# Altium PCB 敏儿好学.PcbDoc (part 5 of 6)
Units mm, origin at the board's own origin, x right, y up, seen from the top; angles counter-clockwise.
Board outline 169.8 x 134.24 mm, 2 copper layers (Top Layer, Bottom Layer); 131 components, 191 nets, 797 pads, 168 vias.
Unrouted connection lines stored in the file: 2.
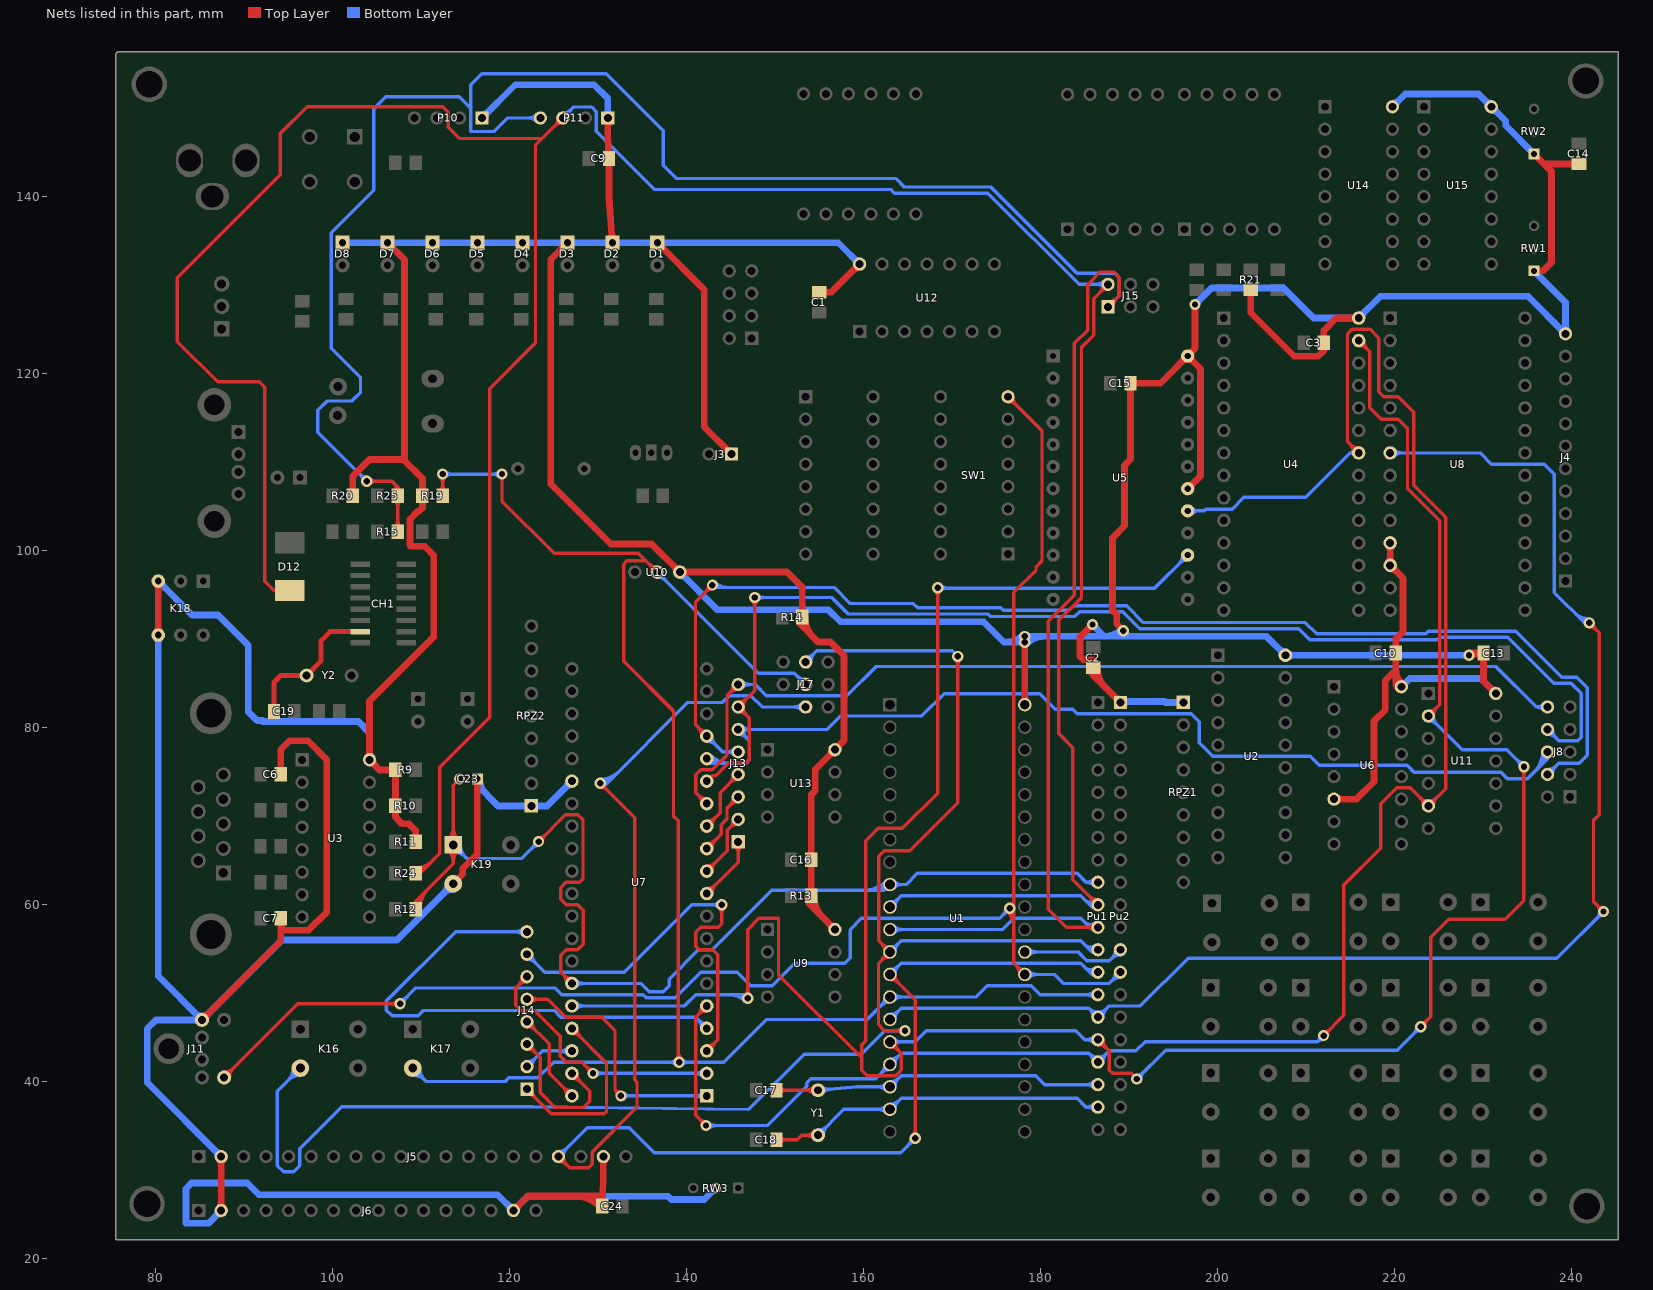
[diagram p5: the nets of this part, all layers, seen from the top]

## Via types
v1: diameter 1.27, hole 0.711, Top Layer to Bottom Layer, 165 vias
v2: diameter 1, hole 0.5, Top Layer to Bottom Layer, 3 vias

## Nets (pads, with @x,y where several pads share a name; then routed paths per layer and width w, separated by ;. In a path a pad name is that pad's centre, name@x,y a point inside that pad or via, vN(x,y) a via of type N, cw(c..) or ccw(c..) an arc to the next point about the centre after c; other vN are vias at no path point) (continued)
P2.7: J11.5 Pu2.13 SW1.8 U1.28 | length 201
  Top Layer w0.381: J11.5@87.708,40.438 96.038,48.768 v1(107.594,48.768) ; J11.5@87.708,41.048 ccw(c87.708,42.519) 88.748,41.478 ccw(c89.789,40.438) J11.5@88.317,40.438 ; v1@107.28,48.454 ccw(c106.521,47.695) 106.521,48.768 ccw(c106.521,49.841) v1@107.28,49.082 ; v1@176.165,59.249 cw(c174.364,57.447) 176.911,57.447 ; SW1.8@176.276,116.789 cw(c176.276,115.438) 177.231,116.393 cw(c178.186,117.348) SW1.8@176.835,117.348 ; SW1.8@176.276,117.348 180.119,113.505 180.119,98.805 179.445,98.131 179.445,97.766 176.911,95.232 176.911,59.563 v1@176.911,59.131 ; v1@176.434,59.518 cw(c175.283,58.367) 176.911,58.367 ; v1(176.479,59.563) v1@176.911,59.131 ; U1.28@177.609,52.07 ccw(c176.23,52.07) 177.205,53.046 ccw(c178.181,54.021) U1.28@178.181,52.642 ; U1.28@178.181,52.07 176.911,53.34 v1@176.911,59.131
  Bottom Layer w0.381: v1(107.594,48.768) 109.372,50.546 125.07,50.546 125.832,49.784 135.039,49.784 135.386,49.437 138.671,49.437 141.559,52.324 145.694,52.324 147.218,50.8 149.631,50.8 152.171,53.34 157.81,53.34 158.445,53.975 158.445,57.15 159.715,58.42 175.336,58.42 v1(176.479,59.563) ; v1@107.594,49.212 ccw(c107.594,50.286) 108.353,49.527 ccw(c109.112,48.768) v1@108.039,48.768 ; v1@176.035,59.563 cw(c174.962,59.563) 175.72,58.804 cw(c176.479,58.045) v1@176.479,59.118 ; U1.28@178.181,52.07 181.508,52.07 182.524,51.054 187.706,51.054 Pu2.13@188.976,52.324 ; U1.28@178.585,51.666 cw(c179.561,50.69) 179.561,52.07 cw(c179.561,53.45) U1.28@178.585,52.474 ; Pu2.13@188.417,52.324 cw(c187.066,52.324) 188.021,51.369 cw(c188.976,50.414) Pu2.13@188.976,51.765
P3.2: J17.3 K16.2 Pu1.12 U1.12 | length 206.8
  Top Layer w0.381: U1.12@162.941,54.038 ccw(c162.941,52.659) 161.965,53.634 ccw(c160.99,54.61) 162.369,54.61 ccw(c160.99,54.61) 161.965,55.586 ccw(c162.941,56.561) U1.12@162.941,55.181 ; v1@164.328,45.406 ccw(c163.57,44.647) 163.57,45.72 ccw(c163.57,46.793) v1@164.328,46.034 ; v1(164.643,45.72) 162.306,45.72 161.65,46.376 161.65,53.319 U1.12@162.941,54.61 161.671,55.88 161.671,65.405 162.306,66.04 165.176,66.04 170.612,71.476 v1(170.612,88.011) ; v1@170.297,87.697 cw(c169.539,86.938) 170.612,86.938 cw(c171.685,86.938) v1@170.926,87.697
  Bottom Layer w0.381: K16.2@95.509,41.488 cw(c93.554,41.488) 94.936,40.106 cw(c96.318,38.724) K16.2@96.318,40.679 ; K16.2@95.89,41.488 cw(c94.855,41.488) 95.587,40.757 cw(c96.318,40.025) K16.2@96.318,41.06 ; K16.2@96.318,41.488 93.726,38.896 93.726,30.48 94.437,29.769 95.555,29.769 96.266,30.48 96.266,32.385 101.003,37.122 122.542,37.122 147.002,36.817 153.249,43.064 159.701,43.064 162.357,45.72 v1(164.643,45.72) ; J17.3@153.416,87.376 154.686,88.646 169.977,88.646 v1(170.612,88.011) ; J17.3@153.416,87.947 ccw(c153.416,89.327) 154.392,88.352 ccw(c155.367,87.376) J17.3@153.987,87.376 ; U1.12@162.941,54.61 164.211,55.88 184.505,55.88 185.521,54.864 Pu1.12@186.436,54.864 ; U1.12@162.941,55.181 ccw(c162.941,56.561) 163.917,55.586 ccw(c164.892,54.61) U1.12@163.512,54.61 ; v1@164.328,45.406 ccw(c163.57,44.647) 163.57,45.72 ccw(c163.57,46.793) v1@164.328,46.034 ; 184.962,55.422 ccw(c185.598,56.058) Pu1.12@186.115,55.322 ; 185.283,55.102 ccw(c185.863,55.681) Pu1.12@186.334,55.01 ; 185.604,54.781 ccw(c186.127,55.304) Pu1.12@186.552,54.698
P3.3: J5.17 J17.5 Pu1.13 U1.13 | length 191.8
  Top Layer w0.381: J5.17@125.476,30.937 cw(c125.476,29.586) 126.431,30.541 cw(c127.386,31.496) J5.17@126.035,31.496 ; J5.17@125.476,31.496 126.746,30.226 128.905,30.226 129.311,30.632 129.311,32.012 134.353,37.054 134.353,39.903 134.087,40.17 134.087,69.799 v1(130.2,73.685) ; v1@130.2,73.241 cw(c130.2,72.168) 130.959,72.927 cw(c131.718,73.685) v1@130.645,73.685 ; U1.13@162.941,51.498 cw(c162.941,50.119) 163.917,51.094 cw(c164.892,52.07) U1.13@163.512,52.07 ; U1.13@162.941,52.07 165.786,49.225 v1(165.786,33.579) ; v1@165.471,33.893 ccw(c164.713,34.652) 165.786,34.652 ccw(c166.859,34.652) v1@166.1,33.893
  Bottom Layer w0.381: J5.17@125.476,31.496 128.74,34.76 133.49,34.76 136.322,31.928 164.135,31.928 v1(165.786,33.579) ; J5.17@125.476,32.055 ccw(c125.476,33.406) 126.431,32.451 ccw(c127.386,31.496) J5.17@126.035,31.496 ; v1@130.2,73.368 ccw(c130.2,74.471) 130.981,73.691 ; v1(130.2,73.685) 130.975,73.685 ; v1@130.2,73.749 ccw(c130.2,75.772) 131.631,74.341 ; v1@130.2,74.13 ccw(c130.2,77.073) 132.281,74.992 ; v1@130.584,73.461 cw(c130.975,73.233) 130.975,73.685 ; v1@130.584,73.91 ccw(c130.975,74.138) 130.975,73.685 ; J17.5@153.012,81.892 ccw(c152.036,80.916) 152.036,82.296 ccw(c152.036,83.676) J17.5@153.012,82.7 ; J17.5@153.416,82.296 148.488,82.296 147.218,83.566 144.78,83.566 144.018,82.804 140.093,82.804 130.975,73.685 ; U1.13@162.941,52.07 164.198,53.327 184.505,53.327 185.508,52.324 Pu1.13@186.436,52.324 ; U1.13@162.941,52.642 ccw(c162.941,54.021) 163.917,53.046 ccw(c164.892,52.07) U1.13@163.512,52.07 ; v1@165.341,33.579 cw(c164.268,33.579) 165.027,32.82 cw(c165.786,32.061) v1@165.786,33.134 ; 184.969,52.863 ccw(c185.588,53.483) Pu1.13@186.106,52.776 ; 185.283,52.549 ccw(c185.854,53.12) Pu1.13@186.331,52.468 ; 185.598,52.234 ccw(c186.12,52.756) Pu1.13@186.556,52.161
P3.4: J17.4 K17.2 Pu1.14 R19.1 U1.14 U10.2 | length 229.3
  Top Layer w0.381: R19.1@112.036,106.658 ccw(c111.169,107.525) 112.395,107.525 ccw(c113.621,107.525) R19.1@112.754,106.658 ; v1@112.081,108.296 cw(c111.322,107.537) 112.395,107.537 cw(c113.468,107.537) v1@112.709,108.296 ; R19.1@112.395,106.172 v1(112.395,108.61) ; v1(119.101,108.61) 119.101,105.562 124.993,99.67 134.518,99.67 U10.2@136.652,97.536 ; 135.382,98.806 133.223,98.806 132.842,98.425 132.842,87.478 138.481,81.839 138.481,69.948 139.001,69.427 139.001,42.278 v1(139.116,42.164) ; U10.2@136.081,97.536 ccw(c134.701,97.536) 135.676,98.512 ccw(c136.652,99.487) U10.2@136.652,98.108 ; v1@138.801,42.478 ccw(c138.319,42.961) 139.001,42.961 ; 139.001,43.513 ccw(c140.465,43.513) v1@139.43,42.478
  Bottom Layer w0.381: K17.2@109.018,40.679 cw(c109.018,38.724) 110.4,40.106 cw(c111.782,41.488) K17.2@109.828,41.488 ; K17.2@109.018,41.06 cw(c109.018,40.025) 109.75,40.757 cw(c110.481,41.488) K17.2@109.447,41.488 ; K17.2@109.018,41.488 110.526,39.98 119.482,39.98 119.888,40.386 123.165,40.386 124.943,42.164 144.17,42.164 148.996,46.99 160.401,46.99 U1.14@162.941,49.53 172.669,49.53 173.939,50.8 178.892,50.8 179.908,49.784 Pu1.14@186.436,49.784 ; v1(112.395,108.61) v1(119.101,108.61) ; v1@112.709,108.296 cw(c113.468,107.537) 113.468,108.61 cw(c113.468,109.684) v1@112.709,108.925 ; v1@118.786,108.296 ccw(c118.027,107.537) 118.027,108.61 ccw(c118.027,109.684) v1@118.786,108.925 ; U10.2@136.652,96.965 cw(c136.652,95.585) 137.628,96.56 cw(c138.603,97.536) U10.2@137.224,97.536 ; U10.2@136.652,97.536 148.082,86.106 152.146,86.106 J17.4@153.416,84.836 ; v1@138.801,41.85 ccw(c138.043,41.091) 138.043,42.164 ccw(c138.043,43.237) v1@138.801,42.478 ; v1@139.43,41.85 cw(c140.189,41.091) 140.189,42.164 cw(c140.189,43.237) v1@139.43,42.478 ; J17.4@152.844,84.836 ccw(c151.465,84.836) 152.44,85.812 ccw(c153.416,86.787) J17.4@153.416,85.407 ; U1.14@162.369,49.53 cw(c160.99,49.53) 161.965,48.554 cw(c162.941,47.579) U1.14@162.941,48.959 ; U1.14@163.345,49.126 cw(c164.321,48.15) 164.321,49.53 cw(c164.321,50.91) U1.14@163.345,49.934 ; Pu1.14@186.04,49.388 ccw(c185.085,48.433) 185.085,49.784 ccw(c185.085,51.135) Pu1.14@186.04,50.18
P3.5: Pu1.15 U1.15 U8.7 | length 175.2
  Top Layer w0.381: v1@241.96,91.351 cw(c241.96,90.278) 242.719,91.037 cw(c243.478,91.796) v1@242.405,91.796 ; v1(241.96,91.796) 243.079,90.677 243.079,70.13 242.43,69.482 242.43,60.312 v1(243.561,59.182) ; v1@243.116,59.182 ccw(c242.043,59.182) 242.802,59.941 ccw(c243.561,60.7) v1@243.561,59.627
  Bottom Layer w0.381: U1.15@162.941,46.99 164.211,48.26 185.42,48.26 Pu1.15@186.436,47.244 187.706,48.514 191.211,48.514 196.621,53.924 238.303,53.924 v1(243.561,59.182) ; U1.15@162.941,47.561 ccw(c162.941,48.941) 163.917,47.966 ccw(c164.892,46.99) U1.15@163.512,46.99 ; Pu1.15@185.877,47.244 ccw(c184.526,47.244) 185.481,48.199 ccw(c186.436,49.154) 186.436,47.803 ccw(c186.436,49.154) 187.391,48.199 ccw(c188.346,47.244) Pu1.15@186.995,47.244 ; U8.7@219.456,110.998 229.62,110.998 230.89,109.728 236.855,109.728 237.998,108.585 237.998,95.225 241.427,91.796 v1(241.96,91.796) ; U8.7@219.86,110.594 cw(c220.836,109.618) 220.836,110.998 cw(c220.836,112.378) U8.7@219.86,111.402 ; 240.291,92.932 ccw(c241.96,94.601) v1@241.96,92.24 ; 240.941,92.281 ccw(c241.96,93.3) v1@241.96,91.859 ; v1@243.116,59.182 cw(c242.043,59.182) 242.802,58.423 cw(c243.561,57.664) v1@243.561,58.737
PA0: J14.8 U7.4 | length 62
  Bottom Layer w0.381: J14.8@121.524,56.5 ccw(c120.569,55.545) 120.569,56.896 ccw(c120.569,58.247) J14.8@121.524,57.292 ; J14.8@121.92,56.896 113.868,56.896 106.045,49.073 106.045,48.031 106.68,47.396 109.626,47.396 110.236,48.006 124.993,48.006 125.755,47.244 140.97,47.244 U7.4@142.24,45.974 ; U7.4@141.668,45.974 ccw(c140.289,45.974) 141.264,46.95 ccw(c142.24,47.925) U7.4@142.24,46.545
PA1: J14.7 U7.3 | length 55.1
  Top Layer w0.381: U7.3@142.24,43.434 143.497,44.691 143.497,54.292 142.939,54.851 141.376,54.851 140.983,55.245 140.983,56.832 141.554,57.404 143.561,57.404 143.942,57.785 v1(143.942,59.944) ; U7.3@142.24,44.005 ccw(c142.24,45.385) 143.216,44.41 ccw(c144.191,43.434) U7.3@142.811,43.434 ; v1@143.627,59.63 cw(c142.869,58.871) 143.942,58.871 cw(c145.015,58.871) v1@144.256,59.63
  Bottom Layer w0.381: J14.7@121.92,53.797 cw(c121.92,52.446) 122.875,53.401 cw(c123.83,54.356) J14.7@122.479,54.356 ; J14.7@121.92,54.356 123.952,52.324 132.944,52.324 140.564,59.944 v1(143.942,59.944) ; v1@143.627,59.63 ccw(c142.869,58.871) 142.869,59.944 ccw(c142.869,61.017) v1@143.627,60.258
PA2: J14.6 U7.2 | length 37.5
  Top Layer w0.381: J14.6@121.361,51.816 cw(c120.01,51.816) 120.965,50.861 cw(c121.92,49.906) J14.6@121.92,51.257 ; J14.6@121.92,51.816 120.675,50.571 120.675,48.578 121.271,47.981 122.808,47.981 125.705,45.085 125.705,42.824 126.365,42.164 128.118,42.164 v1(129.388,40.894) ; v1@128.943,40.894 ccw(c127.87,40.894) 128.629,41.653 ccw(c129.388,42.412) v1@129.388,41.338
  Bottom Layer w0.381: v1(129.388,40.894) U7.2@142.24,40.894 ; v1@129.702,40.58 cw(c130.461,39.821) 130.461,40.894 cw(c130.461,41.967) v1@129.702,41.208 ; U7.2@141.836,40.49 ccw(c140.86,39.514) 140.86,40.894 ccw(c140.86,42.274) U7.2@141.836,41.298
PA3: J14.5 U7.1 | length 36.1
  Top Layer w0.381: J14.5@121.92,49.276 124.249,49.276 126.281,47.244 130.353,47.244 131.877,45.72 131.877,39.014 ; J14.5@122.316,48.88 cw(c123.271,47.925) 123.271,49.276 cw(c123.271,50.627) J14.5@122.316,49.672 ; v1@132.095,38.4 ccw(c131.34,38.478) 131.877,39.014 ; v1@132.491,38.796 cw(c132.413,39.551) 131.877,39.014 ; v1(132.537,38.354) 131.877,39.014
  Bottom Layer w0.381: v1(132.537,38.354) U7.1@142.24,38.354 ; v1@132.852,38.04 cw(c133.61,37.281) 133.61,38.354 cw(c133.61,39.427) v1@132.852,38.668 ; U7.1@141.836,37.95 ccw(c140.86,36.974) 140.86,38.354 ccw(c140.86,39.734) U7.1@141.836,38.758
PA4: J14.4 U7.40 | length 14.8
  Top Layer w0.381: J14.4@121.92,46.177 cw(c121.92,44.826) 122.875,45.781 cw(c123.83,46.736) J14.4@122.479,46.736 ; J14.4@121.92,46.736 124.435,44.221 124.435,40.919 U7.40@127,38.354 ; U7.40@126.428,38.354 ccw(c125.049,38.354) 126.024,39.33 ccw(c127,40.305) U7.40@127,38.925
PA5: J14.3 U7.39 | length 20.9
  Top Layer w0.381: J14.3@121.92,43.637 cw(c121.92,42.286) 122.875,43.241 cw(c123.83,44.196) J14.3@122.479,44.196 ; J14.3@121.92,44.196 123.419,42.697 123.419,38.735 125.12,37.033 128.27,37.033 129.007,37.77 129.007,38.887 U7.39@127,40.894 ; U7.39@127,40.322 cw(c127,38.943) 127.976,39.918 cw(c128.951,40.894) U7.39@127.572,40.894
PA6: J14.2 U7.38 | length 10.1
  Bottom Layer w0.381: J14.2@121.92,41.656 123.698,43.434 U7.38@127,43.434 ; J14.2@121.92,42.215 ccw(c121.92,43.566) 122.875,42.611 ccw(c123.83,41.656) J14.2@122.479,41.656 ; U7.38@126.596,43.03 ccw(c125.62,42.054) 125.62,43.434 ccw(c125.62,44.814) U7.38@126.596,43.838
PA7: J14.1 U7.37 | length 25.5
  Top Layer w0.381: J14.1@121.92,38.557 cw(c121.92,37.206) 122.875,38.161 cw(c123.83,39.116) J14.1@122.479,39.116 ; J14.1@121.92,39.116 124.689,36.347 130.683,36.347 130.912,36.576 130.912,42.062 U7.37@127,45.974 ; U7.37@127,45.402 cw(c127,44.023) 127.976,44.998 cw(c128.951,45.974) U7.37@127.572,45.974
PC0: J8.10 J13.8 U7.14 | length 120.3
  Top Layer w0.381: U7.14@141.668,71.374 ccw(c140.289,71.374) 141.264,72.35 ccw(c142.24,73.325) U7.14@142.24,71.945 ; U7.14@142.24,71.374 140.983,72.631 140.983,74.612 141.567,75.197 142.875,75.197 144.526,76.848 144.526,83.566 J13.8@145.796,84.836 ; J13.8@145.237,84.836 cw(c143.886,84.836) 144.841,83.881 cw(c145.796,82.926) J13.8@145.796,84.277
  Bottom Layer w0.381: J13.8@145.796,84.836 147.701,84.836 148.971,83.566 158.064,83.566 161.366,86.868 231.387,86.868 235.959,82.296 ; J13.8@146.192,84.44 cw(c147.147,83.485) 147.147,84.836 cw(c147.147,86.187) J13.8@146.192,85.232 ; J8.10@236.825,81.917 ccw(c235.959,81.118) 235.959,82.296 ; J8.10@236.825,82.675 cw(c235.959,83.474) 235.959,82.296 ; J8.10@237.236,82.296 235.959,82.296
PC1: J8.8 J13.7 U7.15 | length 143.2
  Top Layer w0.381: U7.15@142.24,73.914 142.837,74.511 143.243,74.511 144.702,75.971 146.685,75.971 147.041,76.327 147.041,81.051 J13.7@145.796,82.296 147.65,84.15 v1(147.65,94.666) ; J13.7@145.796,81.737 cw(c145.796,80.386) 146.751,81.341 cw(c147.706,82.296) 146.355,82.296 cw(c147.706,82.296) 146.751,83.251 cw(c145.796,84.206) J13.7@145.796,82.855 ; v1@147.336,94.351 cw(c146.577,93.593) 147.65,93.593 cw(c148.723,93.593) v1@147.965,94.351
  Bottom Layer w0.381: v1(147.65,94.666) 156.381,94.666 158.247,92.8 174.01,92.8 174.287,92.523 183.836,92.523 184.366,93.053 189.268,93.053 191.173,91.148 209.127,91.148 210.395,89.88 224.78,89.88 225.059,90.159 232.76,90.159 237.944,84.976 239.89,84.976 241.046,83.82 241.046,78.867 240.665,78.486 238.506,78.486 J8.8@237.236,79.756 ; v1@147.965,94.351 cw(c148.723,93.593) 148.723,94.666 cw(c148.723,95.739) v1@147.965,94.98 ; J8.8@237.236,79.197 cw(c237.236,77.846) 238.191,78.801 cw(c239.146,79.756) J8.8@237.795,79.756
PC2: J8.6 J13.6 U7.16 | length 124.4
  Bottom Layer w0.381: U7.16@142.105,76.319 ccw(c143.007,77.221) 143.007,75.946 ; U7.16@142.24,76.454 142.24,75.946 146.685,75.946 147.066,76.327 147.066,78.486 J13.6@145.796,79.756 155.88,79.756 157.404,81.28 166.535,81.28 169.062,83.807 179.845,83.807 181.61,82.042 183.591,82.042 184.099,81.534 196.977,81.534 197.866,80.645 197.866,78.232 199.39,76.708 210.414,76.708 211.43,75.692 221.386,75.692 222.148,74.93 231.978,74.93 232.715,74.193 234.975,74.193 237.236,76.454 J8.6@237.236,77.216 ; U7.16@142.375,76.589 ccw(c143.926,78.14) 143.926,75.946 ; U7.16@142.644,76.858 ccw(c144.846,79.06) 144.846,75.946 ; J13.6@145.796,79.197 cw(c145.796,77.846) 146.751,78.801 cw(c147.706,79.756) J13.6@146.355,79.756 ; J13.6@146.192,79.36 cw(c147.147,78.405) 147.147,79.756 cw(c147.147,81.107) J13.6@146.192,80.152 ; 235.742,74.96 ccw(c233.486,77.216) J8.6@236.677,77.216 ; 236.392,75.61 ccw(c234.787,77.216) J8.6@237.058,77.216 ; 237.043,76.261 ccw(c236.088,77.216) J8.6@237.439,77.216
PC3: J8.4 J13.5 U7.17 | length 152.7
  Top Layer w0.381: U7.17@141.668,78.994 ccw(c140.289,78.994) 141.264,79.97 ccw(c142.24,80.945) U7.17@142.24,79.566 ; U7.17@142.24,78.994 140.97,80.264 140.97,94.158 v1(142.875,96.063) ; v1@142.43,96.063 cw(c141.357,96.063) 142.116,95.304 cw(c142.875,94.545) v1@142.875,95.618
  Bottom Layer w0.381: U7.17@142.24,78.422 cw(c142.24,77.043) 143.216,78.018 cw(c144.191,78.994) U7.17@142.811,78.994 ; U7.17@142.24,78.994 144.018,77.216 J13.5@145.796,77.216 ; v1(142.875,96.063) 143.142,95.796 156.623,95.796 158.439,93.98 165.571,93.98 166.065,93.486 175.468,93.486 175.745,93.209 183.15,93.209 183.68,93.739 189.674,93.739 191.579,91.834 209.884,91.834 211.152,90.566 223.482,90.566 223.761,90.845 233.652,90.845 238.836,85.661 240.525,85.661 241.732,84.455 241.732,76.835 240.843,75.946 238.506,75.946 J8.4@237.236,74.676 ; v1@142.92,96.108 ccw(c143.672,96.86) 143.672,95.796 ; v1@143.189,96.377 ccw(c144.592,97.78) 144.592,95.796 ; J13.5@145.4,76.82 ccw(c144.445,75.865) 144.445,77.216 ccw(c144.445,78.567) J13.5@145.4,77.612 ; J8.4@237.236,75.235 ccw(c237.236,76.586) 238.191,75.631 ccw(c239.146,74.676) J8.4@237.795,74.676
PC4: J13.4 U7.13 | length 11.6
  Top Layer w0.381: U7.13@142.24,68.834 143.748,70.342 143.748,72.628 J13.4@145.796,74.676 ; U7.13@142.24,69.406 ccw(c142.24,70.785) 143.216,69.81 ccw(c144.191,68.834) U7.13@142.811,68.834 ; J13.4@145.237,74.676 cw(c143.886,74.676) 144.841,73.721 cw(c145.796,72.766) J13.4@145.796,74.117
PC5: J13.3 U7.12 | length 11.6
  Top Layer w0.381: U7.12@142.24,66.294 143.865,67.919 143.865,68.987 144.526,69.648 144.526,70.866 J13.3@145.796,72.136 ; U7.12@142.24,66.865 ccw(c142.24,68.245) 143.216,67.27 ccw(c144.191,66.294) U7.12@142.811,66.294 ; J13.3@145.237,72.136 cw(c143.886,72.136) 144.841,71.181 cw(c145.796,70.226) J13.3@145.796,71.577
PC6: J13.2 U7.11 | length 11.6
  Top Layer w0.381: U7.11@142.24,63.754 144.551,66.065 144.551,68.351 J13.2@145.796,69.596 ; U7.11@142.24,64.325 ccw(c142.24,65.705) 143.216,64.73 ccw(c144.191,63.754) U7.11@142.811,63.754 ; J13.2@145.237,69.596 cw(c143.886,69.596) 144.841,68.641 cw(c145.796,67.686) J13.2@145.796,69.037
PC7: J13.1 U7.10 | length 11.6
  Top Layer w0.381: U7.10@142.24,61.214 145.796,64.77 J13.1@145.796,67.056 ; U7.10@142.24,61.785 ccw(c142.24,63.165) 143.216,62.19 ccw(c144.191,61.214) U7.10@142.811,61.214 ; J13.1@145.4,66.66 cw(c144.445,65.705) 145.796,65.705 cw(c147.147,65.705) J13.1@146.192,66.66
PSEN: Pu2.12 U1.29 | length 16
  Bottom Layer w0.381: U1.29@178.181,54.61 184.2,54.61 185.191,53.619 187.731,53.619 Pu2.12@188.976,54.864 ; U1.29@178.585,54.206 cw(c179.561,53.23) 179.561,54.61 cw(c179.561,55.99) U1.29@178.585,55.014 ; Pu2.12@188.417,54.864 cw(c187.066,54.864) 188.021,53.909 cw(c188.976,52.954) Pu2.12@188.976,54.305
RD: Pu1.17 U1.17 U4.22 U5.17 U7.5 U11.6 | length 250.2
  Top Layer w0.381: U7.5@141.668,48.514 cw(c140.289,48.514) 141.264,47.538 cw(c142.24,46.563) U7.5@142.24,47.942 ; v1@141.719,35.001 ccw(c140.646,35.001) 141.405,35.76 ccw(c142.164,36.519) v1@142.164,35.446 ; v1(142.164,35.001) 140.983,36.182 140.983,47.257 U7.5@142.24,48.514 ; v1(211.938,45.161) 214.224,47.447 214.224,62.179 218.389,66.345 218.389,71.349 220.193,73.152 221.742,73.152 U11.6@223.774,71.12 225.73,73.076 225.73,103.734 222.104,107.359 222.104,115.614 220.37,117.348 218.745,117.348 218.186,117.907 218.186,123.952 217.183,124.955 215.138,124.955 214.643,124.46 214.643,112.255 U4.22@215.9,110.998 ; v1@211.938,45.606 ccw(c211.938,46.679) 212.696,45.92 ccw(c213.455,45.161) v1@212.382,45.161 ; U4.22@215.328,110.998 ccw(c213.949,110.998) 214.924,111.974 ccw(c215.9,112.949) U4.22@215.9,111.569 ; U11.6@223.215,71.12 ccw(c221.864,71.12) 222.819,72.075 ccw(c223.774,73.03) 223.774,71.679 ccw(c223.774,73.03) 224.729,72.075 ccw(c225.684,71.12) U11.6@224.333,71.12
  Bottom Layer w0.381: v1(142.164,35.001) 149.06,35.001 153.518,39.459 153.518,39.814 153.987,40.284 161.315,40.284 U1.17@162.941,41.91 164.211,43.18 185.42,43.18 Pu1.17@186.436,42.164 187.706,43.434 190.729,43.434 191.77,44.475 211.252,44.475 ; v1@142.478,34.687 cw(c143.237,33.928) 143.237,35.001 cw(c143.237,36.074) v1@142.478,35.316 ; U1.17@162.369,41.91 cw(c160.99,41.91) 161.965,40.934 cw(c162.941,39.959) U1.17@162.941,41.338 ; U1.17@162.941,42.481 ccw(c162.941,43.861) 163.917,42.886 ccw(c164.892,41.91) U1.17@163.512,41.91 ; Pu1.17@185.877,42.164 ccw(c184.526,42.164) 185.481,43.119 ccw(c186.436,44.074) 186.436,42.723 ccw(c186.436,44.074) 187.391,43.119 ccw(c188.346,42.164) Pu1.17@186.995,42.164 ; U5.17@196.576,104.454 198.434,104.454 198.628,104.648 201.6,104.648 202.933,105.981 209.914,105.981 214.93,110.998 ; U5.17@196.972,104.058 cw(c197.927,103.103) 197.927,104.454 cw(c197.927,105.805) U5.17@196.972,104.85 ; v1@211.494,45.128 cw(c210.661,45.066) 211.252,44.475 ; v1@211.905,44.718 ccw(c211.843,43.884) 211.252,44.475 ; v1(211.938,45.161) 211.252,44.475 ; U4.22@215.4,110.721 ccw(c214.93,110.461) 214.93,110.998 ; U4.22@215.4,111.275 cw(c214.93,111.535) 214.93,110.998 ; U4.22@215.9,110.998 214.93,110.998
RST: C23.2 K19.1 Pu1.9 R12.2 U1.9 U7.35 | length 163.4
  Top Layer w0.381: R12.2@109.093,59.563 cw(c110.364,59.563) 109.465,60.462 ; R12.2@109.141,60.028 ccw(c109.002,60.343) 109.347,60.343 ccw(c109.692,60.343) R12.2@109.553,60.028 ; R12.2@109.347,59.436 109.347,60.343 113.59,64.586 K19.1@113.59,66.716 113.59,73.442 C23.2@114.316,74.168 ; R12.2@109.474,59.563 cw(c111.665,59.563) 110.116,61.112 ; R12.2@109.855,59.563 cw(c112.966,59.563) 110.766,61.763 ; K19.1@113.018,66.144 cw(c111.636,64.762) 113.59,64.762 cw(c115.544,64.762) K19.1@114.162,66.144 ; K19.1@113.018,67.288 ccw(c111.636,68.67) 113.59,68.67 ccw(c115.544,68.67) K19.1@114.162,67.288 ; K19.1@113.287,66.413 cw(c112.556,65.682) 113.59,65.682 cw(c114.625,65.682) K19.1@113.893,66.413 ; K19.1@113.287,67.019 ccw(c112.556,67.75) 113.59,67.75 ccw(c114.625,67.75) K19.1@113.893,67.019 ; v1(123.241,67.081) 126.263,70.104 127.686,70.104 128.257,69.532 128.257,62.865 127.864,62.471 126.314,62.471 125.73,61.887 125.73,60.579 126.365,59.944 127.635,59.944 128.27,59.309 128.27,55.499 127.635,54.864 126.365,54.864 125.73,54.229 125.73,52.324 U7.35@127,51.054 ; v1@123.241,67.526 ccw(c123.241,68.599) 124,67.84 ccw(c124.758,67.081) v1@123.685,67.081 ; U7.35@126.428,51.054 ccw(c125.049,51.054) 126.024,52.03 ccw(c127,53.005) U7.35@127,51.626
  Bottom Layer w0.381: K19.1@113.59,65.906 cw(c113.59,63.952) 114.972,65.334 cw(c116.354,66.716) K19.1@114.4,66.716 ; K19.1@113.59,66.287 cw(c113.59,65.253) 114.322,65.985 cw(c115.053,66.716) K19.1@114.019,66.716 ; K19.1@113.59,66.716 115.13,65.176 121.336,65.176 v1(123.241,67.081) ; v1@122.796,67.081 cw(c121.723,67.081) 122.482,66.323 cw(c123.241,65.564) v1@123.241,66.637 ; U7.35@127,51.054 134.793,51.054 135.725,50.123 137.308,50.123 137.986,50.8 137.986,51.549 141.3,54.864 142.85,54.864 149.581,61.595 162.306,61.595 U1.9@162.941,62.23 164.775,62.23 166.032,63.487 184.086,63.487 185.089,62.484 Pu1.9@186.436,62.484 ; U7.35@127.404,50.65 cw(c128.38,49.674) 128.38,51.054 cw(c128.38,52.434) U7.35@127.404,51.458 ; 160.028,61.595 ccw(c160.028,65.143) U1.9@162.537,62.634 ; 160.948,61.595 ccw(c160.948,64.223) U1.9@162.806,62.365 ; 161.868,61.595 ccw(c161.868,63.303) U1.9@163.076,62.095 ; U1.9@163.345,61.826 cw(c164.321,60.85) 164.321,62.23 cw(c164.321,63.61) U1.9@163.345,62.634 ; Pu1.9@186.04,62.089 ccw(c185.089,61.143) 185.089,62.484 ccw(c185.089,63.825) Pu1.9@186.04,62.879
RXD: D12.1 J15.2 P11.3 Pu1.10 R24.2 U1.10 | length 383.4
  Top Layer w0.381: D12.1@93.705,95.17 ccw(c93.32,95.056) 93.32,95.458 ; D12.1@93.705,95.746 cw(c93.32,95.86) 93.32,95.458 ; D12.1@95.123,95.458 93.32,95.458 ; R24.2@109.347,63.5 109.347,63.729 110.071,63.729 ; R24.2@109.347,63.754 ccw(c109.347,65.563) 110.626,64.284 ; R24.2@109.347,64.135 ccw(c109.347,66.864) 111.277,64.934 ; R24.2@109.781,63.892 ccw(c110.071,64.068) 110.071,63.729 ; R24.2@109.848,63.541 cw(c110.071,63.502) 110.071,63.729 ; 123.673,146.533 114.3,146.533 113.03,147.803 113.03,149.479 112.395,150.114 97.079,150.114 94.056,147.091 94.056,142.443 82.423,130.81 82.423,123.571 86.97,119.024 91.694,119.024 92.278,118.44 92.278,96.499 93.32,95.458 ; P11.3@125.425,148.844 cw(c124.074,148.844) 125.029,147.889 cw(c125.984,146.934) P11.3@125.984,148.285 ; P11.3@125.984,148.844 122.885,145.745 122.885,123.419 117.729,118.262 117.729,81.128 112.09,75.489 112.09,65.748 110.071,63.729 ; Pu1.10@185.877,59.944 ccw(c184.526,59.944) 185.481,60.899 ccw(c186.436,61.854) Pu1.10@186.436,60.503 ; Pu1.10@186.436,59.944 183.604,62.776 183.604,77.71 182.016,79.298 182.016,92.075 184.582,94.64 184.582,122.947 185.954,124.319 185.954,128.423 J15.2@187.579,130.048 ; J15.2@187.02,130.048 cw(c185.669,130.048) 186.624,129.093 cw(c187.579,128.138) J15.2@187.579,129.489
  Bottom Layer w0.381: P11.3@125.984,148.844 127.229,150.089 129.222,150.089 129.769,149.542 129.769,147.32 136.323,140.767 163.03,140.767 163.449,140.348 174.003,140.348 184.302,130.048 J15.2@187.579,130.048 ; P11.3@125.984,149.403 ccw(c125.984,150.754) 126.939,149.799 ccw(c127.894,148.844) P11.3@126.543,148.844 ; U1.10@162.941,59.69 164.198,60.947 184.505,60.947 185.508,59.944 Pu1.10@186.436,59.944 ; U1.10@162.941,60.261 ccw(c162.941,61.641) 163.917,60.666 ccw(c164.892,59.69) U1.10@163.512,59.69 ; 184.969,60.483 ccw(c185.588,61.103) Pu1.10@186.106,60.396 ; 185.283,60.169 ccw(c185.854,60.74) Pu1.10@186.331,60.088 ; 185.598,59.854 ccw(c186.12,60.376) Pu1.10@186.556,59.781 ; J15.2@187.183,129.652 ccw(c186.228,128.697) 186.228,130.048 ccw(c186.228,131.399) J15.2@187.183,130.444
TXD: J15.1 P11.4 Pu1.11 R15.1 R25.2 U1.11 | length 312
  Top Layer w0.381: v1(103.835,107.798) 106.693,107.798 107.315,107.175 ; v1@104.15,107.483 cw(c104.908,106.724) 104.908,107.798 cw(c104.908,108.871) v1@104.15,108.112 ; 106.761,107.729 cw(c105.654,106.623) R25.2@107.19,106.323 ; R15.1@106.956,102.594 ccw(c106.089,103.461) 107.315,103.461 ccw(c108.541,103.461) R15.1@107.674,102.594 ; R25.2@106.956,105.686 cw(c106.089,104.819) 107.315,104.819 cw(c108.541,104.819) R25.2@107.674,105.686 ; R25.2@107.063,106.74 ccw(c106.813,107.175) 107.315,107.175 ; 107.267,107.223 cw(c106.502,106.458) R25.2@107.564,106.25 ; R15.1@107.315,102.108 107.315,107.175 ; R25.2@107.567,106.74 cw(c107.817,107.175) 107.315,107.175 ; Pu1.11@186.04,57.008 ccw(c185.085,56.053) 185.085,57.404 ccw(c185.085,58.755) Pu1.11@186.04,57.8 ; Pu1.11@186.436,57.404 182.88,57.404 180.823,59.461 180.823,91.961 183.769,94.907 183.769,123.381 185.268,124.88 185.268,130.023 186.69,131.445 188.214,131.445 188.849,130.81 188.849,128.778 J15.1@187.579,127.508 ; J15.1@187.579,128.067 ccw(c187.579,129.418) 188.534,128.463 ccw(c189.489,127.508) J15.1@188.138,127.508
  Bottom Layer w0.381: v1@103.391,107.798 ccw(c102.318,107.798) 103.076,108.556 ccw(c103.835,109.315) v1@103.835,108.242 ; v1(103.835,107.798) 98.298,113.335 98.298,115.824 99.339,116.865 102.133,116.865 103.124,117.856 103.124,119.507 99.797,122.834 99.797,135.89 104.597,140.691 104.597,149.86 105.969,151.232 114.3,151.232 115.57,149.962 ; P11.4@123.048,148.448 ccw(c122.093,147.493) 122.093,148.844 ccw(c122.093,150.195) P11.4@123.048,149.24 ; P11.4@123.444,148.844 119.761,148.844 118.237,147.32 115.57,147.32 115.57,152.578 116.84,153.848 130.886,153.848 137.312,147.422 137.312,143.51 138.811,142.011 163.572,142.011 164.538,141.046 174.32,141.046 184.073,131.293 188.366,131.293 188.849,130.81 188.849,128.778 J15.1@187.579,127.508 ; U1.11@162.941,57.15 175.641,57.15 176.911,58.42 184.505,58.42 185.521,57.404 Pu1.11@186.436,57.404 ; U1.11@163.345,56.746 cw(c164.321,55.77) 164.321,57.15 cw(c164.321,58.53) U1.11@163.345,57.554 ; 184.962,57.962 ccw(c185.598,58.598) Pu1.11@186.115,57.862 ; 185.283,57.642 ccw(c185.863,58.221) Pu1.11@186.334,57.55 ; 185.604,57.321 ccw(c186.127,57.844) Pu1.11@186.552,57.238 ; J15.1@187.579,128.067 ccw(c187.579,129.418) 188.534,128.463 ccw(c189.489,127.508) J15.1@188.138,127.508
VCC: C1.1 C2.1 C3.1 C6.2 C7.2 C9.1 C10.1 C13.1 C14.1 C15.1 C16.1 C23.1 C24.2 D1.1 D2.1 D3.1 D4.1 D5.1 D6.1 D7.1 D8.1 J3.1 J4.12 J5.2 J5.19 J6.2 J6.15 J11.4 K18.3 K18.4 K19.2 P10.1 P11.1 Pu2.1 R9.1 R10.1 R11.1 R13.2 R14.2 R19.2 R20.1 R21.1 RPZ1.1 RPZ2.1 RW1.1 RW2.1 RW3.2 U1.40 U2.20 U3.16 U4.28 U5.18 U5.24 U6.6 U6.16 U7.26 U8.11 U8.12 U9.8 U10.3 U11.14 U12.14 U13.8 U14.16 U15.16 | length 1180.8
  Top Layer w0.762: K18.4@79.995,90.693 ccw(c79.344,91.344) 80.264,91.344 ccw(c81.184,91.344) K18.4@80.533,90.693 ; K18.3@79.995,96.251 cw(c79.344,95.6) 80.264,95.6 cw(c81.184,95.6) K18.3@80.533,96.251 ; K18.4@80.264,90.424 K18.3@80.264,96.52 ; J11.4@85.208,46.938 94.107,55.837 C7.2@94.107,58.42 ; J11.4@85.208,47.357 ccw(c85.208,48.369) 85.923,47.653 ccw(c86.639,46.938) J11.4@85.627,46.938 ; J6.2@87.115,25.661 ccw(c86.485,26.291) 87.376,26.291 ccw(c88.267,26.291) J6.2@87.637,25.661 ; J5.2@87.115,31.235 cw(c86.485,30.605) 87.376,30.605 cw(c88.267,30.605) J5.2@87.637,31.235 ; J6.2@87.376,25.4 J5.2@87.376,31.496 ; C6.2@93.882,75.028 ccw(c93.34,75.57) 94.107,75.57 ccw(c94.874,75.57) C6.2@94.332,75.028 ; 94.107,57.468 94.501,57.074 97.257,57.074 99.314,59.131 99.314,76.327 97.155,78.486 95.123,78.486 94.107,77.47 C6.2@94.107,74.676 ; R20.1@102.01,106.524 ccw(c101.468,107.066) 102.235,107.066 ccw(c103.002,107.066) R20.1@102.46,106.524 ; R20.1@102.235,106.172 102.235,108.356 104.14,110.261 107.95,110.261 110.109,108.102 110.109,104.775 109.753,104.419 109.626,104.419 108.712,103.505 108.712,100.711 108.725,100.711 108.725,100.444 110.376,100.444 111.379,99.441 111.379,90.195 104.14,82.956 U3.16@104.14,76.327 105.283,75.184 R9.1@107.061,75.184 107.061,69.85 107.823,69.088 108.585,69.088 109.347,68.326 R11.1@109.347,67.056 ; U3.16@103.879,76.588 ccw(c103.249,77.218) 104.14,77.218 ccw(c105.031,77.218) U3.16@104.401,76.588 ; U3.16@104.14,75.958 cw(c104.14,75.067) 104.77,75.697 cw(c105.4,76.327) U3.16@104.509,76.327 ; D7.1@106.172,134.328 cw(c106.172,133.316) 106.887,134.032 cw(c107.603,134.747) D7.1@106.591,134.747 ; D7.1@106.172,134.747 108.077,132.842 108.077,110.261 108.013,110.198 ; R10.1@106.836,70.768 cw(c106.294,70.226) 107.061,70.226 cw(c107.828,70.226) R10.1@107.286,70.768 ; R10.1@106.836,71.472 ccw(c106.294,72.014) 107.061,72.014 ccw(c107.828,72.014) R10.1@107.286,71.472 ; R9.1@106.836,74.832 cw(c106.294,74.29) 107.061,74.29 cw(c107.828,74.29) R9.1@107.286,74.832 ; R9.1@106.836,74.959 ccw(c106.294,74.417) 106.294,75.184 ccw(c106.294,75.951) R9.1@106.836,75.409 ; R11.1@109.122,67.408 ccw(c108.58,67.95) 109.347,67.95 ccw(c110.114,67.95) R11.1@109.572,67.408 ; R19.2@109.884,105.82 cw(c109.342,105.278) 110.109,105.278 cw(c110.876,105.278) R19.2@110.334,105.82 ; R19.2@109.884,106.524 ccw(c109.342,107.066) 110.109,107.066 ccw(c110.876,107.066) R19.2@110.334,106.524 ; K19.2@113.59,62.316 114.67,63.396 114.67,64.049 116.316,65.696 C23.1@116.316,74.168 ; J6.15@120.396,25.4 122.047,27.051 130.429,27.051 C24.2@130.429,25.908 130.556,28.829 J5.19@130.556,31.496 ; J6.15@120.396,25.769 ccw(c120.396,26.66) 121.026,26.03 ccw(c121.656,25.4) J6.15@120.765,25.4 ; D3.1@126.073,134.747 cw(c125.061,134.747) 125.777,134.032 cw(c126.492,133.316) D3.1@126.492,134.328 ; D3.1@126.492,134.747 124.612,132.867 124.612,107.493 131.394,100.711 136.017,100.711 U10.3@139.192,97.536 151.308,97.536 153.035,95.809 153.035,91.44 154.832,89.643 156.21,89.643 157.753,88.1 157.753,78.505 154.508,75.26 154.508,72.873 154.051,72.415 154.051,59.817 U9.8@156.718,57.15 ; 127.21,27.051 cw(c127.21,22.816) C24.2@130.204,25.81 ; 129.049,27.051 cw(c129.049,24.655) C24.2@130.743,26.349 ; C24.2@130.204,26.26 ccw(c129.662,26.802) 130.429,26.802 ccw(c131.196,26.802) C24.2@130.654,26.26 ; C24.2@130.214,26.269 ccw(c129.684,26.848) 130.468,26.814 ; J5.19@130.295,31.235 cw(c129.665,30.605) 130.556,30.605 cw(c131.447,30.605) J5.19@130.817,31.235 ; 130.467,26.787 ccw(c131.214,26.755) C24.2@130.663,26.25 ; P11.1@130.803,148.583 cw(c130.173,147.953) 131.064,147.953 cw(c131.955,147.953) P11.1@131.325,148.583 ; C9.1@130.955,144.611 ccw(c130.402,145.109) 131.145,145.148 ; C9.1@130.966,143.92 cw(c130.424,143.378) 131.191,143.378 cw(c131.958,143.378) C9.1@131.416,143.92 ; P11.1@131.064,148.844 131.064,146.685 C9.1@131.191,144.272 131.191,139.903 D2.1@131.572,134.747 ; 131.143,145.18 ccw(c131.931,145.222) C9.1@131.403,144.635 ; D2.1@131.255,135.021 ccw(c130.489,135.681) 131.497,135.756 ccw(c132.506,135.83) D2.1@131.846,135.064 ; D1.1@136.652,134.328 cw(c136.652,133.316) 137.367,134.032 cw(c138.083,134.747) D1.1@137.071,134.747 ; D1.1@136.652,134.747 141.948,129.451 141.948,113.957 J3.1@145.034,110.871 ; U10.3@138.811,97.536 ccw(c137.891,97.536) 138.542,98.186 ccw(c139.192,98.837) U10.3@139.192,97.917 ; U10.3@139.461,97.267 cw(c140.112,96.616) 140.112,97.536 cw(c140.112,98.456) U10.3@139.461,97.805 ; J3.1@144.665,110.871 ccw(c143.774,110.871) 144.404,111.501 ccw(c145.034,112.131) J3.1@145.034,111.24 ; R14.2@152.59,92.329 ccw(c153.664,92.329) 152.905,91.57 ; R14.2@152.81,92.808 ccw(c152.268,93.35) 153.035,93.35 ccw(c153.802,93.35) R14.2@153.26,92.808 ; R14.2@153.352,92.329 ccw(c156.265,92.329) 154.206,90.269 ; R13.2@153.606,60.833 ccw(c154.986,60.833) 154.011,59.857 ; R13.2@153.826,61.312 ccw(c153.284,61.854) 154.051,61.854 ccw(c154.818,61.854) R13.2@154.276,61.312 ; C16.1@153.826,64.672 cw(c153.284,64.13) 154.051,64.13 cw(c154.818,64.13) C16.1@154.276,64.672 ; C16.1@153.826,65.376 ccw(c153.284,65.918) 154.051,65.918 ccw(c154.818,65.918) C16.1@154.276,65.376 ; R13.2@154.368,60.833 ccw(c157.588,60.833) 155.311,58.557 ; C1.1@154.94,129.159 156.337,129.159 U12.14@159.512,132.334 ; C1.1@155.292,128.934 cw(c155.834,128.392) 155.834,129.159 cw(c155.834,129.926) C1.1@155.292,129.384 ; U9.8@156.349,57.15 ccw(c155.458,57.15) 156.088,57.78 ccw(c156.718,58.41) U9.8@156.718,57.519 ; U13.8@156.349,77.47 cw(c155.458,77.47) 156.088,76.84 cw(c156.718,76.21) U13.8@156.718,77.101 ; U13.8@156.718,77.839 ccw(c156.718,78.73) 157.348,78.1 ccw(c157.978,77.47) U13.8@157.087,77.47 ; U12.14@159.143,132.334 cw(c158.252,132.334) 158.882,131.704 cw(c159.512,131.074) U12.14@159.512,131.965 ; U1.40@177.912,82.819 ccw(c177.261,83.47) 178.181,83.47 ccw(c179.101,83.47) U1.40@178.45,82.819 ; U1.40@178.181,82.55 v1(178.181,90.272) ; C2.1@185.611,86.741 ccw(c186.99,86.741) 186.015,85.765 ; C2.1@185.703,86.516 cw(c185.161,85.974) 185.928,85.974 cw(c186.695,85.974) C2.1@186.153,86.516 ; C2.1@185.703,86.966 ccw(c185.161,87.508) 185.928,87.508 ccw(c186.695,87.508) C2.1@186.153,86.966 ; v1(185.814,91.605) 184.417,90.208 184.417,88.011 184.785,87.643 185.928,87.643 185.928,85.852 Pu2.1@188.976,82.804 ; 185.928,85.843 cw(c186.74,85.843) C2.1@186.248,86.489 ; C2.1@186.373,86.741 ccw(c189.592,86.741) 187.315,84.465 ; Pu2.1@188.607,82.804 ccw(c187.716,82.804) 188.346,83.434 ccw(c188.976,84.064) Pu2.1@188.976,83.173 ; v1(189.306,90.907) 188.57,91.643 188.57,92.723 188.074,93.218 188.074,101.409 189.433,102.768 189.433,109.601 190.119,110.287 C15.1@190.119,118.872 193.494,118.872 197.409,122.787 v1(197.409,127.762) ; C15.1@189.894,118.52 cw(c189.352,117.978) 190.119,117.978 cw(c190.886,117.978) C15.1@190.344,118.52 ; C15.1@190.344,118.647 cw(c190.886,118.105) 190.886,118.872 cw(c190.886,119.639) C15.1@190.344,119.097 ; U5.24@196.207,121.954 cw(c195.316,121.954) 195.946,121.324 cw(c196.576,120.694) 196.576,121.585 cw(c196.576,120.694) 197.206,121.324 cw(c197.836,121.954) U5.24@196.945,121.954 ; U5.18@196.576,106.954 198.018,108.396 198.018,120.512 U5.24@196.576,121.954 ; U5.18@196.576,107.323 ccw(c196.576,108.214) 197.206,107.584 ccw(c197.836,106.954) U5.18@196.945,106.954 ; R21.1@203.483,129.188 cw(c202.941,128.646) 203.708,128.646 cw(c204.475,128.646) R21.1@203.933,129.188 ; R21.1@203.708,129.413 203.708,126.835 208.623,121.92 211.328,121.92 211.963,122.555 ; 211.709,122.301 ccw(c211.298,122.712) C3.1@211.728,123.103 ; C3.1@211.738,123.796 ccw(c211.196,124.338) 211.963,124.338 ccw(c212.73,124.338) C3.1@212.188,123.796 ; C3.1@211.739,123.092 cw(c211.207,122.555) 211.963,122.555 ; C3.1@212.187,123.092 ccw(c212.719,122.555) 211.963,122.555 ; U6.6@213.106,71.882 215.667,71.882 217.627,73.842 217.627,80.7 218.897,81.97 218.897,85.268 220.091,86.462 ccw(c221.983,86.462) U6.16@220.931,84.889 ; U6.6@213.367,71.621 cw(c213.997,70.991) 213.997,71.882 cw(c213.997,72.773) U6.6@213.367,72.143 ; U4.28@215.631,125.969 ccw(c214.98,125.318) 214.98,126.238 ccw(c214.98,127.158) U4.28@215.631,126.507 ; U4.28@215.9,126.238 213.36,126.238 211.963,124.841 211.963,122.555 ; U8.12@219.187,98.567 ccw(c218.536,99.218) 219.456,99.218 ccw(c220.376,99.218) U8.12@219.725,98.567 ; U8.11@219.187,100.569 cw(c218.536,99.918) 219.456,99.918 cw(c220.376,99.918) U8.11@219.725,100.569 ; U8.12@219.456,97.917 cw(c219.456,96.997) 220.106,97.648 cw(c220.757,98.298) U8.12@219.837,98.298 ; U8.11@219.456,100.838 U8.12@219.456,98.298 220.904,96.85 220.904,90.805 220.091,89.992 220.091,85.217 U6.16@220.726,84.582 ; C10.1@219.866,88.04 cw(c219.324,87.498) 220.091,87.498 cw(c220.858,87.498) C10.1@220.316,88.04 ; C10.1@219.866,88.744 ccw(c219.324,89.286) 220.091,89.286 ccw(c220.858,89.286) C10.1@220.316,88.744 ; 220.091,85.035 ccw(c221.029,85.035) U6.16@220.507,84.255 ; v1(228.371,88.138) 228.625,88.392 C13.1@229.997,88.392 229.997,85.217 U11.14@231.394,83.82 ; v1@228.551,87.958 cw(c229.598,86.912) C13.1@229.598,88.392 ; C13.1@229.772,88.04 cw(c229.23,87.498) 229.997,87.498 cw(c230.764,87.498) C13.1@230.222,88.04 ; C13.1@229.772,88.167 ccw(c229.23,87.625) 229.23,88.392 ccw(c229.23,89.159) C13.1@229.772,88.617 ; U11.14@231.025,83.82 ccw(c230.134,83.82) 230.764,84.45 ccw(c231.394,85.08) U11.14@231.394,84.189 ; RW1.1@235.712,131.572 236.717,131.572 237.684,132.538 237.684,142.808 RW2.1@235.712,144.78 ; 236.855,143.637 C14.1@240.792,143.637 ; C14.1@240.44,143.412 ccw(c239.898,142.87) 239.898,143.637 ccw(c239.898,144.404) C14.1@240.44,143.862 ; C7.2@93.882,58.068 cw(c93.34,57.526) 94.107,57.526 ; C7.2@93.882,58.068 cw(c93.34,57.526) 94.107,57.526 ; C7.2@93.882,58.068 cw(c93.34,57.526) 94.107,57.526 ; C7.2@93.882,58.068 cw(c93.34,57.526) 94.107,57.526 ; 94.107,57.526 cw(c94.874,57.526) C7.2@94.332,58.068 ; 94.107,57.526 cw(c94.874,57.526) C7.2@94.332,58.068 ; 94.107,57.526 cw(c94.874,57.526) C7.2@94.332,58.068 ; 94.107,57.526 cw(c94.874,57.526) C7.2@94.332,58.068 ; 153.035,91.562 cw(c153.802,91.562) 153.26,92.104 ccw(c153.802,91.562) 153.035,91.562 ; 153.035,91.562 ccw(c152.268,91.562) 152.81,92.104 cw(c152.268,91.562) 153.035,91.562 ; 154.051,60.066 cw(c154.818,60.066) 154.276,60.608 ccw(c154.818,60.066) 154.051,60.066 ; 154.051,60.066 ccw(c153.284,60.066) 153.826,60.608 cw(c153.284,60.066) 154.051,60.066
  Bottom Layer w0.762: K18.4@79.995,90.155 cw(c79.344,89.504) 80.264,89.504 cw(c81.184,89.504) K18.4@80.533,90.155 ; K18.4@80.264,90.424 80.264,51.882 J11.4@85.208,46.938 ; K18.3@80.264,96.139 cw(c80.264,95.219) 80.914,95.87 cw(c81.565,96.52) K18.3@80.645,96.52 ; K18.3@80.264,96.52 84.099,92.685 87.02,92.685 90.424,89.281 90.424,81.788 91.44,80.772 92.075,80.772 ; J11.4@84.789,46.938 ccw(c83.777,46.938) 84.493,47.653 ccw(c85.208,48.369) 85.208,47.357 ccw(c85.208,48.369) 85.923,47.653 ccw(c86.639,46.938) J11.4@85.627,46.938 ; J11.4@84.912,46.642 ccw(c84.196,45.926) 84.196,46.938 ccw(c84.196,47.95) J11.4@84.912,47.234 ; J6.2@87.007,25.4 cw(c86.116,25.4) 86.746,24.77 cw(c87.376,24.14) J6.2@87.376,25.031 ; J5.2@87.007,31.496 ccw(c86.116,31.496) 86.746,32.126 ccw(c87.376,32.756) J5.2@87.376,31.865 ; J6.2@87.376,25.4 85.928,23.952 83.388,23.952 83.388,27.864 84.023,28.499 90.322,28.499 91.643,27.178 118.618,27.178 J6.15@120.396,25.4 121.996,27 137.871,27 138.227,26.645 141.961,26.645 RW3.2@143.256,27.94 ; J5.2@87.376,31.496 79.019,39.853 79.019,45.947 80.01,46.938 J11.4@85.208,46.938 ; 92.075,80.645 102.87,80.645 104.14,79.375 U3.16@104.14,76.327 ; D8.1@101.092,134.747 157.099,134.747 U12.14@159.512,132.334 ; D8.1@101.388,134.451 cw(c102.104,133.735) 102.104,134.747 cw(c102.104,135.759) D8.1@101.388,135.043 ; U3.16@103.879,76.588 ccw(c103.249,77.218) 104.14,77.218 ccw(c105.031,77.218) U3.16@104.401,76.588 ; D7.1@105.876,134.451 ccw(c105.16,133.735) 105.16,134.747 ccw(c105.16,135.759) D7.1@105.876,135.043 ; D7.1@106.468,134.451 cw(c107.184,133.735) 107.184,134.747 cw(c107.184,135.759) D7.1@106.468,135.043 ; D6.1@110.956,134.451 ccw(c110.24,133.735) 110.24,134.747 ccw(c110.24,135.759) D6.1@110.956,135.043 ; D6.1@111.548,134.451 cw(c112.264,133.735) 112.264,134.747 cw(c112.264,135.759) D6.1@111.548,135.043 ; K19.2@112.971,62.316 cw(c111.477,62.316) 112.533,61.259 cw(c113.59,60.203) K19.2@113.59,61.697 ; K19.2@113.59,62.316 107.23,55.956 94.226,55.956 J11.4@85.208,46.938 ; D5.1@116.036,134.451 ccw(c115.32,133.735) 115.32,134.747 ccw(c115.32,135.759) D5.1@116.036,135.043 ; C23.1@116.316,74.168 116.316,73.46 118.656,71.12 124.206,71.12 U7.26@127,73.914 ; C23.1@116.56,74.168 ccw(c118.858,74.168) 117.233,72.543 ; D5.1@116.628,134.451 cw(c117.344,133.735) 117.344,134.747 cw(c117.344,135.759) D5.1@116.628,135.043 ; P10.1@116.84,148.844 120.599,152.603 129.516,152.603 131.064,151.055 P11.1@131.064,148.844 ; P10.1@116.84,149.213 ccw(c116.84,150.104) 117.47,149.474 ccw(c118.1,148.844) P10.1@117.209,148.844 ; J6.15@120.027,25.4 ccw(c119.136,25.4) 119.766,26.03 ccw(c120.396,26.66) 120.396,25.769 ccw(c120.396,26.66) 121.026,26.03 ccw(c121.656,25.4) J6.15@120.765,25.4 ; D4.1@121.116,134.451 ccw(c120.4,133.735) 120.4,134.747 ccw(c120.4,135.759) D4.1@121.116,135.043 ; D4.1@121.708,134.451 cw(c122.424,133.735) 122.424,134.747 cw(c122.424,135.759) D4.1@121.708,135.043 ; RPZ2.1@122.159,70.851 ccw(c121.508,70.2) 121.508,71.12 ccw(c121.508,72.04) RPZ2.1@122.159,71.389 ; RPZ2.1@122.697,70.851 cw(c123.348,70.2) 123.348,71.12 cw(c123.348,72.04) RPZ2.1@122.697,71.389 ; D3.1@126.196,134.451 ccw(c125.48,133.735) 125.48,134.747 ccw(c125.48,135.759) D3.1@126.196,135.043 ; U7.26@126.619,73.914 cw(c125.699,73.914) 126.35,73.264 cw(c127,72.613) U7.26@127,73.533 ; D3.1@126.788,134.451 cw(c127.504,133.735) 127.504,134.747 cw(c127.504,135.759) D3.1@126.788,135.043 ; P11.1@130.803,149.105 ccw(c130.173,149.735) 131.064,149.735 ccw(c131.955,149.735) P11.1@131.325,149.105 ; D2.1@131.276,134.451 ccw(c130.56,133.735) 130.56,134.747 ccw(c130.56,135.759) D2.1@131.276,135.043 ; D2.1@131.868,134.451 cw(c132.584,133.735) 132.584,134.747 cw(c132.584,135.759) D2.1@131.868,135.043 ; D1.1@136.356,134.451 ccw(c135.64,133.735) 135.64,134.747 ccw(c135.64,135.759) D1.1@136.356,135.043 ; D1.1@136.948,134.451 cw(c137.664,133.735) 137.664,134.747 cw(c137.664,135.759) D1.1@136.948,135.043 ; U10.3@139.192,97.155 cw(c139.192,96.235) 139.842,96.886 cw(c140.493,97.536) U10.3@139.573,97.536 ; U10.3@139.192,97.536 143.459,93.269 156.007,93.269 157.352,91.924 173.515,91.924 175.827,89.611 v1(178.181,89.611) 178.841,90.272 ; U12.14@159.143,132.334 ccw(c158.252,132.334) 158.882,132.964 ccw(c159.512,133.594) U12.14@159.512,132.703 ; 175.973,89.611 ccw(c175.973,92.479) v1@178.001,90.451 ; v1@177.813,89.611 ccw(c177.813,90.64) v1@178.54,89.912 ; v1@177.822,89.97 cw(c178.549,89.243) v1@178.549,90.272 ; v1(178.181,90.272) 205.486,90.272 U2.20@207.62,88.138 v1(228.371,88.138) ; v1@178.361,89.432 cw(c180.389,87.404) 180.389,90.272 ; v1(185.814,91.605) 187.147,90.272 ; 187.16,90.272 ccw(c187.16,93.053) v1@189.127,91.086 ; 188.671,90.272 v1(189.306,90.907) ; Pu2.1@188.976,82.804 189.072,82.9 193.954,82.9 194.05,82.804 RPZ1.1@196.088,82.804 ; 189,90.272 ccw(c189,91.213) v1@189.665,90.547 ; Pu2.1@189.237,82.543 cw(c190.099,81.681) 190.099,82.9 ; RPZ1.1@195.819,82.535 ccw(c195.168,81.884) 195.168,82.804 ccw(c195.168,83.724) RPZ1.1@195.819,83.073 ; v1(197.409,127.762) 199.288,129.642 207.411,129.642 210.815,126.238 U4.28@215.9,126.238 218.364,128.702 235.026,128.702 J4.12@239.268,124.46 239.268,128.016 RW1.1@235.712,131.572 ; U2.20@207.239,88.138 ccw(c206.319,88.138) 206.969,88.788 ccw(c207.62,89.439) U2.20@207.62,88.519 ; U2.20@207.889,87.869 cw(c208.539,87.218) 208.539,88.138 cw(c208.539,89.058) U2.20@207.889,88.407 ; U4.28@215.631,125.969 ccw(c214.98,125.318) 214.98,126.238 ccw(c214.98,127.158) U4.28@215.631,126.507 ; U4.28@215.9,126.619 ccw(c215.9,127.539) 216.55,126.888 ccw(c217.201,126.238) U4.28@216.281,126.238 ; U14.16@219.71,150.114 221.158,151.562 229.438,151.562 232.522,148.478 232.522,147.97 RW2.1@235.712,144.78 ; U14.16@219.71,150.483 ccw(c219.71,151.374) 220.34,150.744 ccw(c220.97,150.114) U14.16@220.079,150.114 ; U6.16@220.726,84.582 221.666,85.522 229.692,85.522 U11.14@231.394,83.82 ; U15.16@230.517,150.114 ccw(c229.626,150.114) 230.256,150.744 ccw(c230.886,151.374) U15.16@230.886,150.483 ; U15.16@230.886,149.745 cw(c230.886,148.854) 231.516,149.484 cw(c232.146,150.114) U15.16@231.255,150.114 ; U11.14@231.025,83.82 ccw(c230.134,83.82) 230.764,84.45 ccw(c231.394,85.08) U11.14@231.394,84.189 ; J4.12@238.899,124.46 ccw(c238.008,124.46) 238.638,125.09 ccw(c239.268,125.72) J4.12@239.268,124.829 ; J4.12@239.007,124.721 ccw(c238.377,125.351) 239.268,125.351 ccw(c240.159,125.351) J4.12@239.529,124.721
WR: Pu1.16 U1.16 U4.27 U5.15 U7.36 U11.2 | length 352.8
  Top Layer w0.381: v1@146.548,49.692 ccw(c145.79,50.451) 146.863,50.451 ccw(c147.936,50.451) v1@147.177,49.692 ; v1(146.863,49.378) 146.863,57.15 148.133,58.42 150.318,58.42 150.343,58.395 150.343,52.057 159.741,42.659 ; U1.16@162.941,43.878 cw(c162.941,42.499) 163.917,43.474 cw(c164.892,44.45) U1.16@163.512,44.45 ; U1.16@162.941,44.45 164.211,43.18 164.211,41.275 163.576,40.64 160.388,40.64 159.753,41.275 ; v1@168.011,95.444 cw(c167.253,94.685) 168.326,94.685 cw(c169.399,94.685) v1@168.64,95.444 ; v1(168.326,95.758) 168.326,72.568 164.338,68.58 161.595,68.58 160.198,67.183 160.198,44.577 159.741,44.12 159.741,42.659 ; Pu1.16@186.436,44.145 cw(c186.436,42.794) 187.391,43.749 cw(c188.346,44.704) Pu1.16@186.995,44.704 ; Pu1.16@186.436,44.704 187.706,43.434 187.706,41.275 188.087,40.894 190.195,40.894 v1(190.83,40.259) ; U4.27@215.9,123.126 cw(c215.9,121.747) 216.876,122.722 cw(c217.851,123.698) U4.27@216.471,123.698 ; U4.27@215.9,123.698 217.17,122.428 217.17,116.078 218.44,114.808 220.345,114.808 221.418,113.735 221.418,106.964 225.044,103.338 225.044,82.55 U11.2@223.774,81.28 ; v1(222.91,46.177) 224.041,47.307 224.041,56.274 226.06,58.293 232.435,58.293 234.569,60.427 v1(234.569,75.54) ; v1@222.91,46.622 ccw(c222.91,47.695) 223.669,46.936 ccw(c224.428,46.177) v1@223.355,46.177 ; U11.2@223.774,81.839 ccw(c223.774,83.19) 224.729,82.235 ccw(c225.684,81.28) U11.2@224.333,81.28 ; v1@234.255,75.225 cw(c233.496,74.466) 234.569,74.466 cw(c235.642,74.466) v1@234.883,75.225 ; 159.741,42.659 159.753,42.647 159.753,41.275 ; 159.741,42.659 159.741,41.288 159.753,41.275
  Bottom Layer w0.381: U7.36@127,48.514 139.725,48.514 140.995,49.784 146.456,49.784 v1(146.863,49.378) ; U7.36@127.404,48.11 cw(c128.38,47.134) 128.38,48.514 cw(c128.38,49.894) U7.36@127.404,48.918 ; 144.809,49.784 cw(c144.809,47.323) v1@146.548,49.063 ; 145.728,49.784 cw(c145.728,48.243) v1@146.818,49.333 ; U1.16@162.941,44.45 165.773,44.45 167.043,45.72 183.921,45.72 184.937,44.704 Pu1.16@186.436,44.704 ; U1.16@163.345,44.046 cw(c164.321,43.07) 164.321,44.45 cw(c164.321,45.83) U1.16@163.345,44.854 ; v1(168.326,95.758) 168.377,95.707 192.829,95.707 U5.15@196.576,99.454 ; v1@168.64,95.444 cw(c169.276,94.808) 169.276,95.707 ; v1@168.64,96.072 ccw(c169.522,96.954) 169.522,95.707 ; Pu1.16@186.04,44.308 ccw(c185.085,43.353) 185.085,44.704 ccw(c185.085,46.055) Pu1.16@186.04,45.1 ; v1(190.83,40.259) 194.093,43.521 220.255,43.521 v1(222.91,46.177) ; v1@190.83,40.703 ccw(c190.83,41.777) 191.589,41.018 ccw(c192.348,40.259) v1@191.275,40.259 ; U5.15@196.017,99.454 cw(c194.666,99.454) 195.621,98.499 cw(c196.576,97.544) U5.15@196.576,98.895 ; v1@222.466,46.177 cw(c221.393,46.177) 222.152,45.418 cw(c222.91,44.66) v1@222.91,45.733 ; U11.2@223.774,80.721 cw(c223.774,79.37) 224.729,80.325 cw(c225.684,81.28) U11.2@224.333,81.28 ; U11.2@223.774,81.28 227.584,77.47 232.639,77.47 v1(234.569,75.54) ; v1@234.124,75.54 ccw(c233.051,75.54) 233.81,76.298 ccw(c234.569,77.057) v1@234.569,75.984
X1: C18.1 Pu1.19 U1.19 Y1.1 | length 51.6
  Top Layer w0.381: C18.1@150.114,33.401 152.476,33.401 152.984,33.909 Y1.1@154.813,33.909 ; C18.1@150.473,33.042 cw(c151.34,32.175) 151.34,33.401 cw(c151.34,34.627) C18.1@150.473,33.76 ; Y1.1@154.391,33.487 ccw(c153.372,32.468) 153.372,33.909 ccw(c153.372,35.35) Y1.1@154.391,34.331
  Bottom Layer w0.381: Y1.1@154.813,33.909 157.734,36.83 U1.19@162.941,36.83 164.198,38.087 184.086,38.087 185.089,37.084 Pu1.19@186.436,37.084 ; Y1.1@154.813,34.506 ccw(c154.813,35.947) 155.832,34.928 ccw(c156.851,33.909) Y1.1@155.41,33.909 ; U1.19@162.537,36.426 ccw(c161.561,35.45) 161.561,36.83 ccw(c161.561,38.21) U1.19@162.537,37.234 ; U1.19@162.941,37.401 ccw(c162.941,38.781) 163.917,37.806 ccw(c164.892,36.83) U1.19@163.512,36.83 ; Pu1.19@186.04,36.689 ccw(c185.089,35.743) 185.089,37.084 ccw(c185.089,38.425) Pu1.19@186.04,37.479
X2: C17.1 Pu1.18 U1.18 Y1.2 | length 50.2
  Top Layer w0.381: C17.1@150.114,38.989 Y1.2@154.813,38.989 ; C17.1@150.473,38.63 cw(c151.34,37.763) 151.34,38.989 cw(c151.34,40.215) C17.1@150.473,39.348 ; Y1.2@154.391,38.567 ccw(c153.372,37.548) 153.372,38.989 ccw(c153.372,40.43) Y1.2@154.391,39.411
  Bottom Layer w0.381: Y1.2@154.813,38.989 159.258,39.37 U1.18@162.941,39.37 164.198,40.627 179.438,40.627 180.442,39.624 Pu1.18@186.436,39.624 ; Y1.2@155.197,39.446 ccw(c156.126,40.548) 156.249,39.112 ccw(c156.372,37.676) Y1.2@155.27,38.605 ; U1.18@162.537,38.966 ccw(c161.561,37.99) 161.561,39.37 ccw(c161.561,40.75) U1.18@162.537,39.774 ; U1.18@162.941,39.941 ccw(c162.941,41.321) 163.917,40.346 ccw(c164.892,39.37) U1.18@163.512,39.37 ; Pu1.18@186.04,39.228 ccw(c185.085,38.273) 185.085,39.624 ccw(c185.085,40.975) Pu1.18@186.04,40.02
XI: C19.1 CH1.7 Y2.2 | length 16.7
  Top Layer w0.56: C19.1@93.345,81.788 93.345,85.09 94.107,85.852 Y2.2@97.028,85.852 98.679,87.503 98.679,89.789 99.695,90.805 CH1.7@103.064,90.805